# Altium PCB PCB1.PcbDoc
Units mm, origin at the board's own origin, x right, y up, seen from the top; angles counter-clockwise.
Board outline 92.5 x 77.5 mm, 2 copper layers (Top Layer, Bottom Layer); 40 components, 35 nets, 204 pads, 37 vias.
Unrouted connection lines stored in the file: 4.
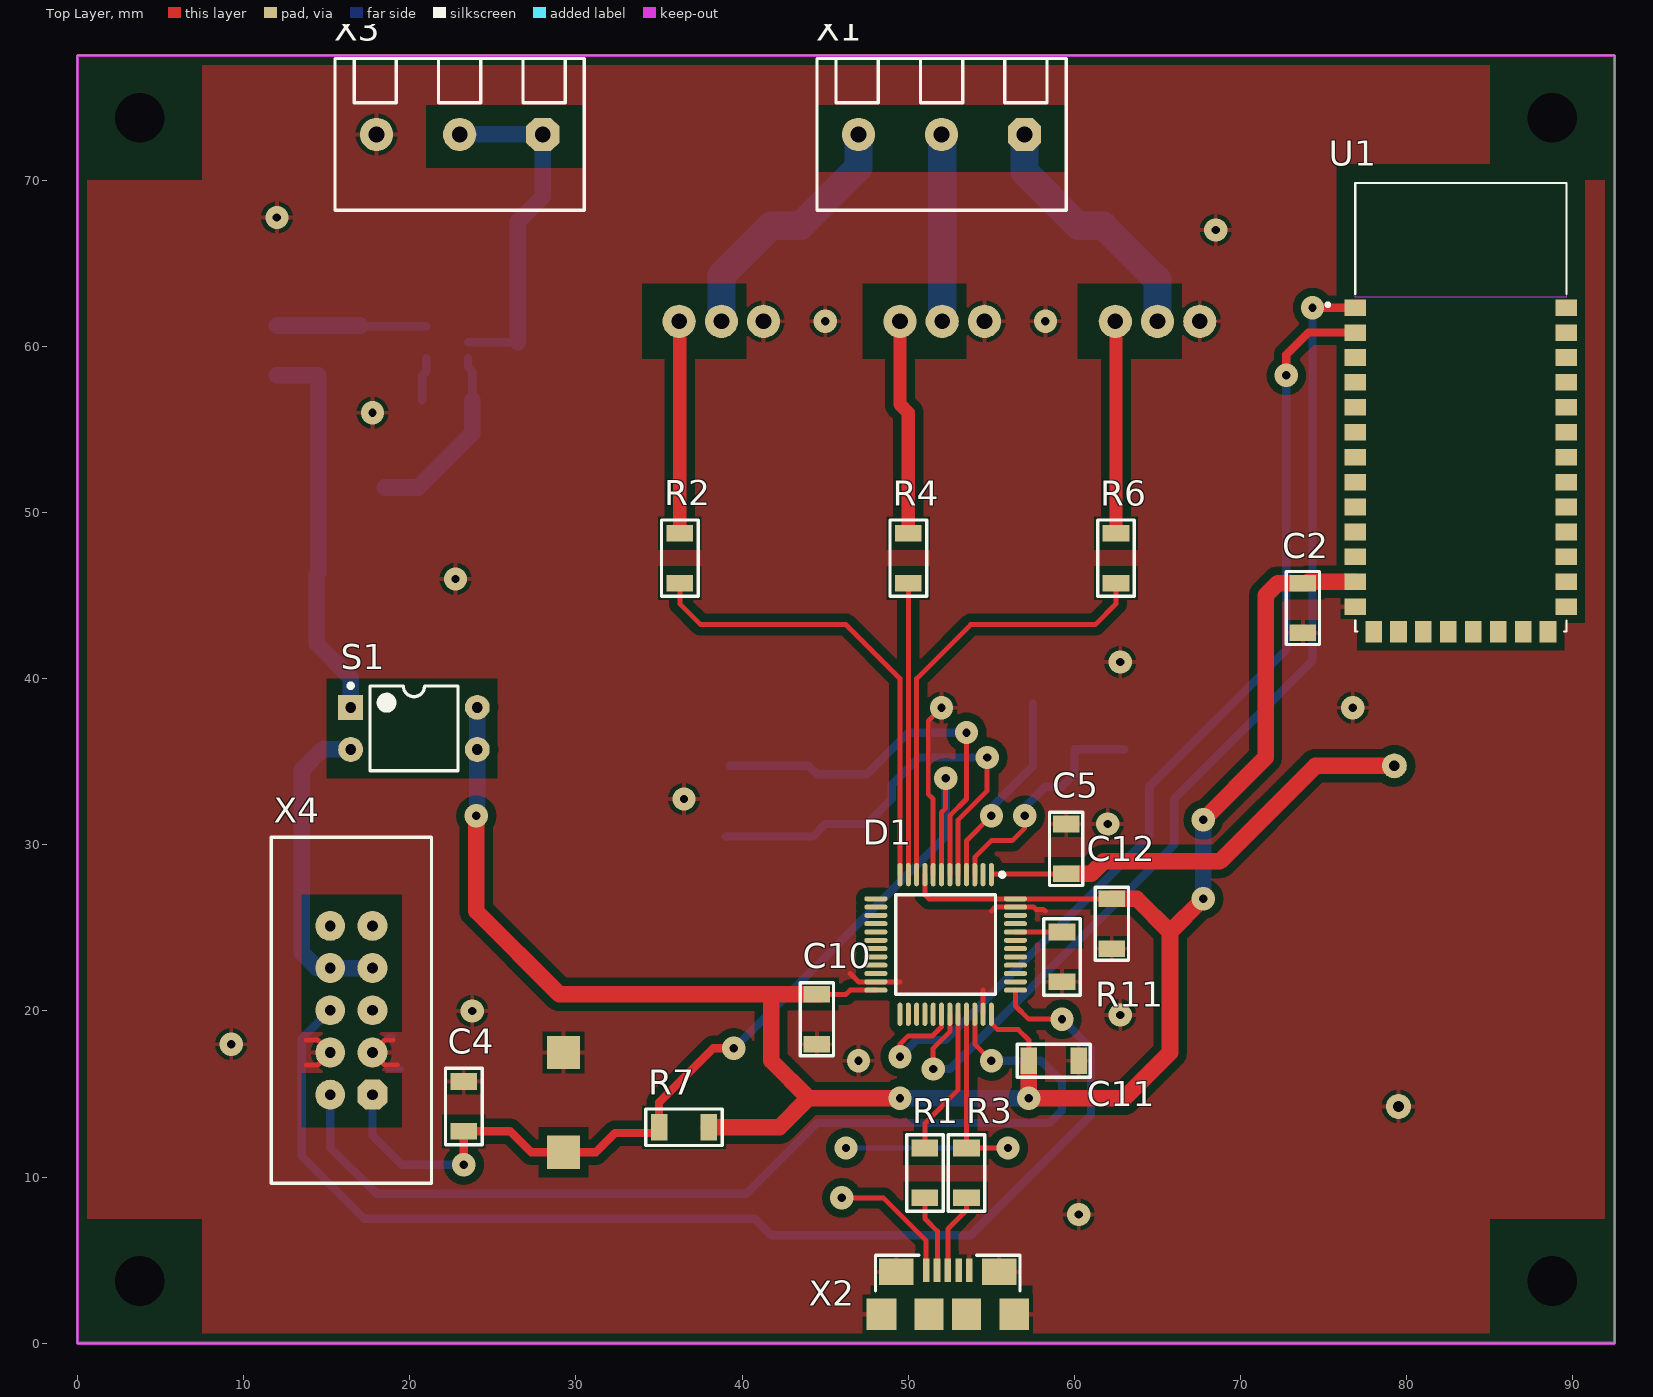
[diagram p0: Top Layer view]
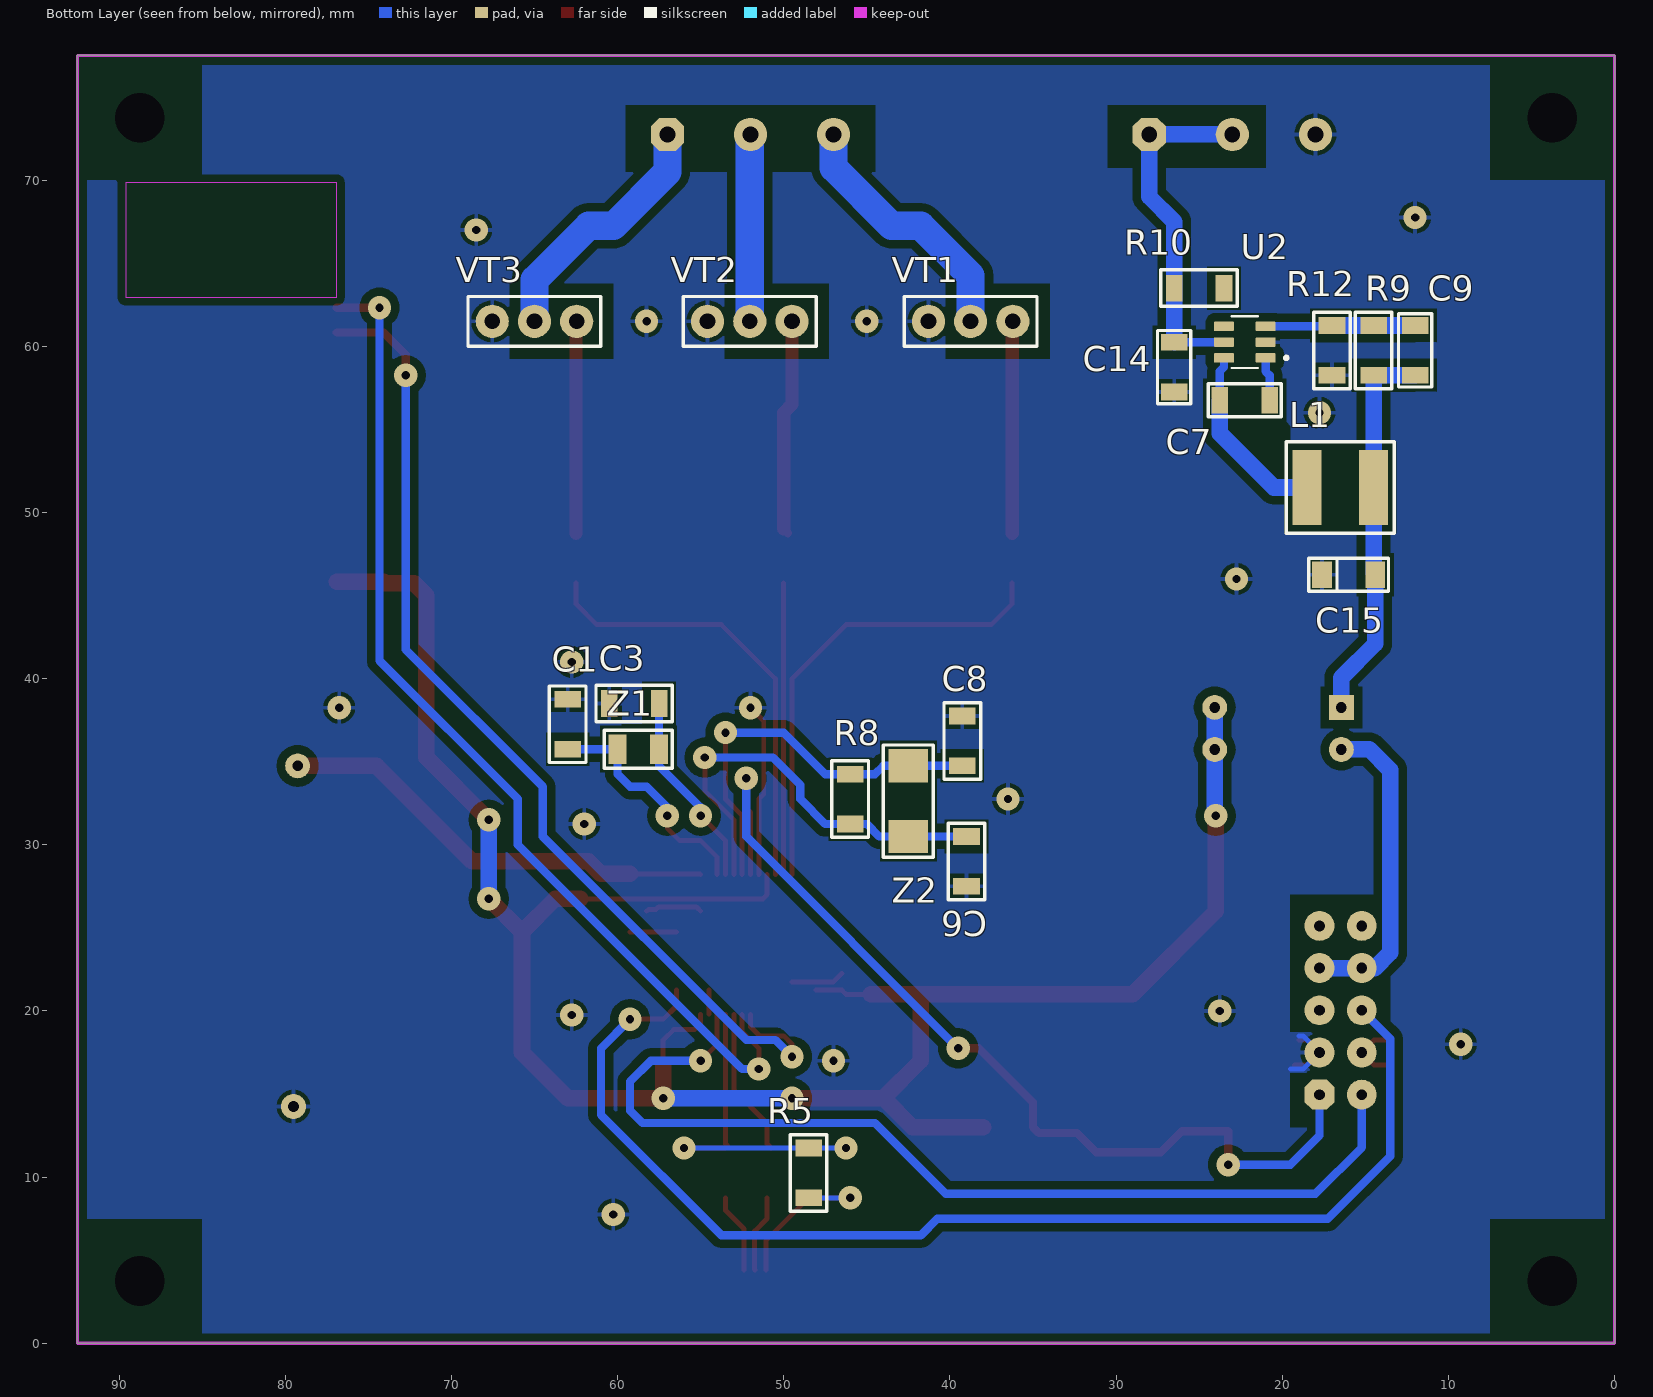
[diagram p1: Bottom Layer view, seen from below]
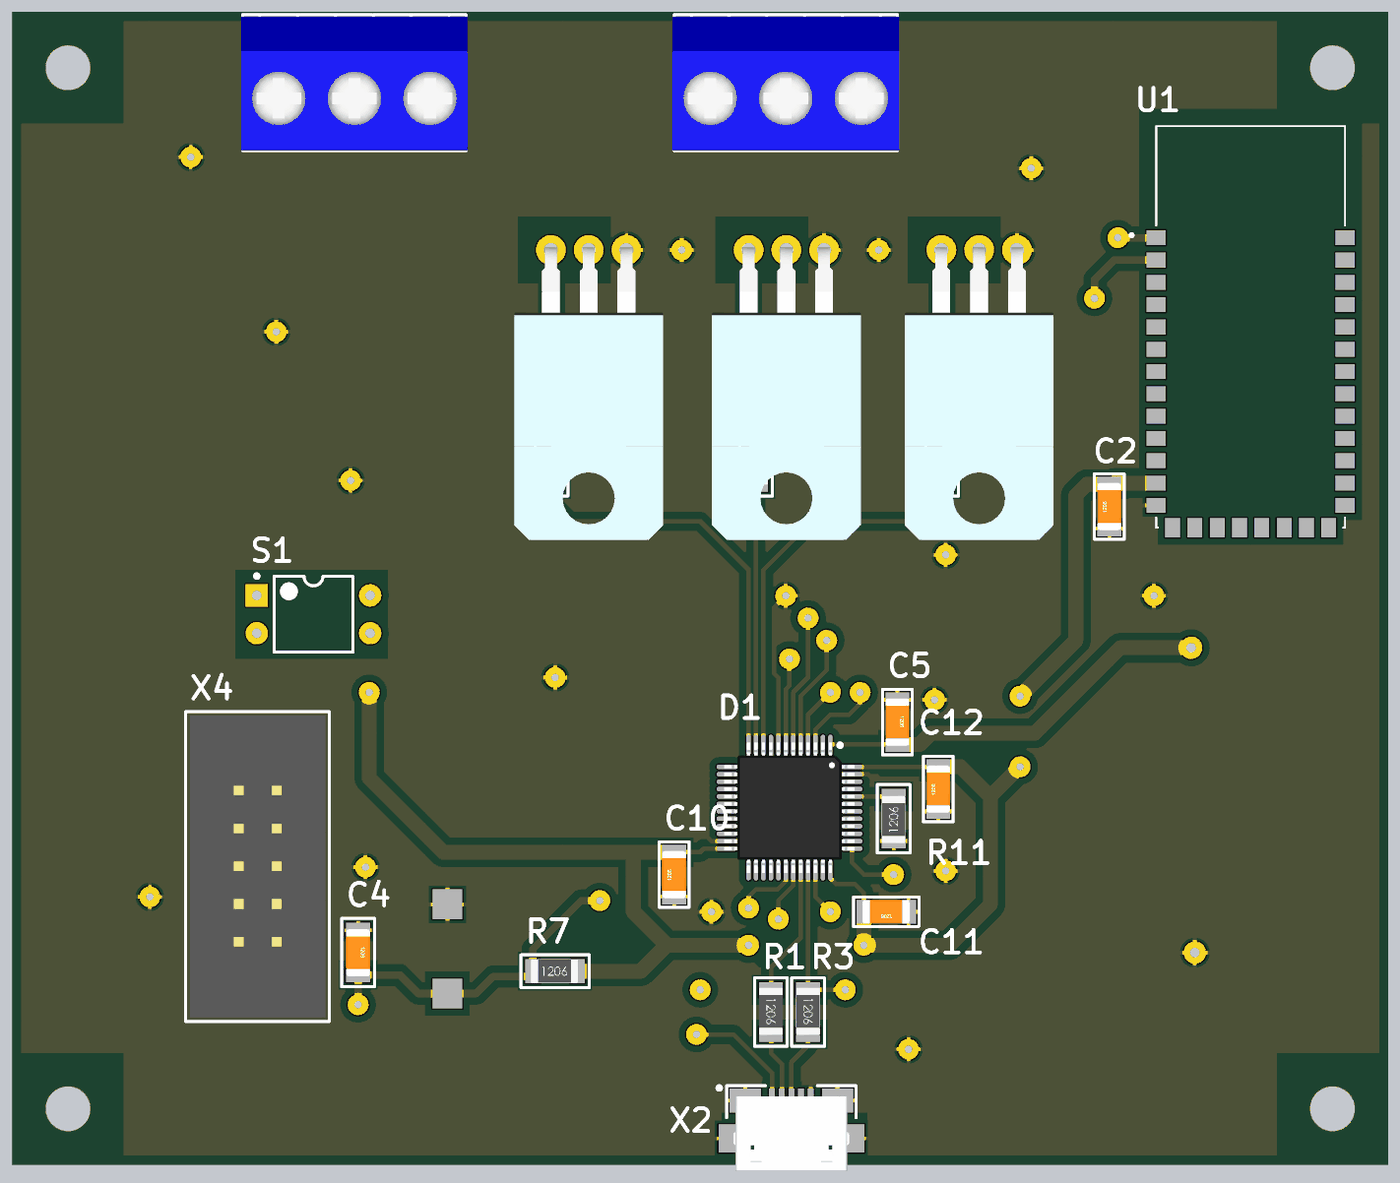
[diagram p2: 3D render of the assembled board from above, using the file's embedded part models]
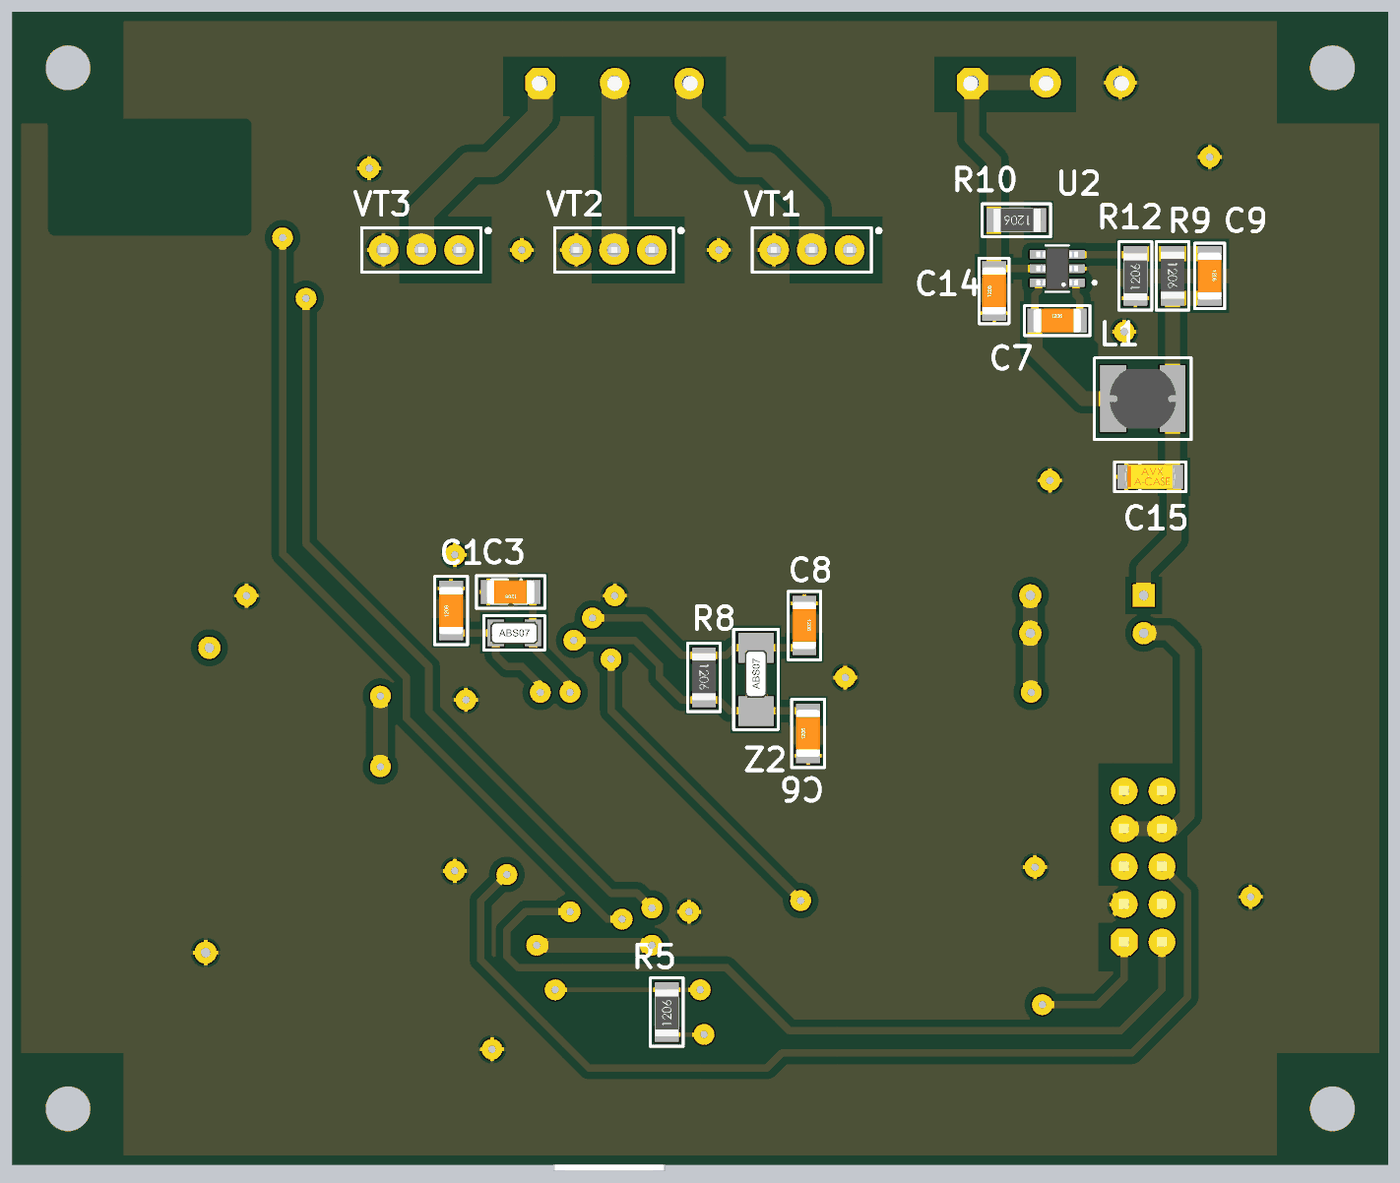
[diagram p3: 3D render of the assembled board from below, using the file's embedded part models]

## Layer stack, top to bottom
Top Solder: solder mask 0.0102, Solder Resist, Dk 3.5
Top Layer: signal copper 0.0356
Dielectric 1: dielectric 0.32, FR-4, Dk 4.8
Bottom Layer: signal copper 0.0356
Bottom Solder: solder mask 0.0102, Solder Resist, Dk 3.5

## Board outline
0,0 0,77.5 92.5,77.5 92.5,0

## Design rules (kind name [scope] priority, off if disabled: settings)
Clearance [All] p1: gap=0.2 ignorepadtopadclearanceinfootprint=TRUE except(0: Arc-Hole Track-Hole SMDPad-Hole THPad-Hole Via-Hole Fill-Hole Poly-Hole Region-Hole Text-Hole; 0.5: Arc-Fill Arc-Poly Arc-Region Track-Fill Track-Poly Track-Region SMDPad-Fill SMDPad-Poly SMDPad-Region THPad-Fill THPad-Poly THPad-Region Via-Fill Via-Poly Via-Region Fill-Fill Fill-Poly Fill-Region Poly-Poly Poly-Region Region-Region)
PolygonConnect [All] p1: connectstyle=Relief reliefconductorwidth=0.254 reliefentries=4 polygonreliefangle="90 Angle" airgapwidth=0.254
RoutingVias [All] p1: holewidth=0.711 width=1.27 viastyle="Through Hole" minholewidth=0.711 minwidth=1.27 maxholewidth=0.711 maxwidth=1.27
SolderMaskExpansion [All] p1: expansion=0.102
Width [All] p1: maxlimit=5 minlimit=0.254 preferedwidth=0.3
30 further rules are at their usual default settings.

## Components (designator, comment, footprint, x,y, rotation, side; value= is the part's Value field where it differs from the comment)
C1 "22pF" CH1206C 63,37.25 r90 bottom
C2 "Ceramic capacitor, 0.1uF, X7R, ±10%, 50V, 1206, -55...+125°C" "CAP: 1206" 73.75,44.25 r90 top value=0.1uF
C3 "22pF" CH1206C 59,38.5 r0 bottom
C4 "1uF" CH1206C 23.25,14.25 r270 top
C5 "Ceramic capacitor, 0.1uF, X7R, ±10%, 50V, 1206, -55...+125°C" "CAP: 1206" 59.5,29.75 r270 top value=0.1uF
C6 "22pF" CH1206C 39,29 r90 bottom
C7 "Ceramic capacitor, 0.1μF, X7R, ±10%, 50V, 1206, -55...+125°C" "CAP: 1206" 22.25,56.75 r180 bottom value=0.1?F
C8 "22pF" CH1206C 39.25,36.25 r270 bottom
C9 "Ceramic capacitor, 22pF, X7R, ±10%, 50V, 1206, -55...+125°C" "CAP: 1206" 12,59.75 r270 bottom value=22pF
C10 "Ceramic capacitor, 0.1uF, X7R, ±10%, 50V, 1206, -55...+125°C" "CAP: 1206" 44.5,19.5 r90 top value=0.1uF
C11 "Ceramic capacitor, 0.1uF, X7R, ±10%, 50V, 1206, -55...+125°C" "CAP: 1206" 58.75,17 r180 top value=0.1uF
C12 "Ceramic capacitor, 0.1uF, X7R, ±10%, 50V, 1206, -55...+125°C" "CAP: 1206" 62.25,25.25 r90 top value=0.1uF
C14 "Ceramic capacitor, 4.7μF, X7R, ±10%, 50V, 1206, -55...+125°C" "CAP: 1206" 26.5,58.75 r90 bottom value=4.7?F
C15 "Tantalum capacitor, 4.7μF, 6.3V, ±10%, 1.2Ohm, case B (3528), -55...+125°C" "CAP: TANTAL-A" 16,46.25 r180 bottom value=4.7?F
D1 "IC microcontroller, 32-Bit, Cortex-M3, 72MHz, 64KB, 20KB, 2...3.6V, -40...+85°C, 48-LQFP" 48-LQFP 52.25,24 r270 top
L1 "330uF" "IND: CD43" 16.5,51.5 r0 bottom
R1 "20" CH1206R 51,10.25 r270 top
R2 "1.5k" CH1206R 36.25,47.25 r270 top
R3 "20" CH1206R 53.5,10.25 r270 top
R4 "1.5k" CH1206R 50,47.25 r270 top
R5 "4.7k" CH1206R 48.5,10.25 r90 bottom
R6 "1.5k" CH1206R 62.5,47.25 r270 top
R7 "10k" CH1206R 36.5,13 r0 top
R8 "1M" CH1206R 46,32.75 r270 bottom
R9 "110k" CH1206R 14.5,59.75 r270 bottom
R10 "10k" CH1206R 25,63.5 r0 bottom
R11 "100k" CH1206R 59.25,23.25 r90 top
R12 "24k" CH1206R 17,59.75 r90 bottom
S1 "SW DIP-2" DIP-4 20.25,37 r0 top
U1 "HC-06" XCVR_HC-05 83.25,56 r0 top
U2 "SY8120B1ABC" SOT95P280X145-6N 22.25,60.25 r0 bottom
VT1 "КТ863А" TO220_123_H 38.75,61.5 r0 bottom
VT2 "КТ863А" TO220_123_H 52.04,61.5 r0 bottom
VT3 "КТ863А" TO220_123_H 65,61.5 r0 bottom
X1 "RGB Tape" "CON: 300-03P-5.0" 52,72.75 r180 top
X2 "\"USB micro\"" "CON: USB-A micro" 52.375,4.4 r0 top
X3 "Power" "CON: 300-03P-5.0" 23,72.75 r180 top
X4 "ST-LINK V2" "CON: IDC-10MS" 16.48,20.04 r90 top
Z1 "Crystal, 32.768kHz, 12.5pF, ±20ppm, case 3215, -40...+85°C" "OSC: 3215"#1 58.75,35.75 r180 bottom
Z2 "8MHz" "OSC: 3215"#2 42.5,33 r90 bottom

## Footprints (in the part's own frame and the unit in brackets; to place one, negate y for a bottom-side part, rotate by r counter-clockwise, add the part's x,y. Pads: shape width x height; smd on the part's side, far side on the other; paste and mask are expansions set on the pad)
48-LQFP [mm] "QFP, 48-Leads, Body 7x7mm, Pitch 0.5mm, IPC Medium Density"
  oval 1.4x0.3 smd: 1(-4.2,2.75) 2(-4.2,2.25) 3(-4.2,1.75) 4(-4.2,1.25) 5(-4.2,0.75) 6(-4.2,0.25) 7(-4.2,-0.25) 8(-4.2,-0.75) 9(-4.2,-1.25) 10(-4.2,-1.75) 11(-4.2,-2.25) 12(-4.2,-2.75) 25(4.2,-2.75) 26(4.2,-2.25) 27(4.2,-1.75) 28(4.2,-1.25) 29(4.2,-0.75) 30(4.2,-0.25) 31(4.2,0.25) 32(4.2,0.75) 33(4.2,1.25) 34(4.2,1.75) 35(4.2,2.25) 36(4.2,2.75)
  oval 0.3x1.4 smd: 13(-2.75,-4.2) 14(-2.25,-4.2) 15(-1.75,-4.2) 16(-1.25,-4.2) 17(-0.75,-4.2) 18(-0.25,-4.2) 19(0.25,-4.2) 20(0.75,-4.2) 21(1.25,-4.2) 22(1.75,-4.2) 23(2.25,-4.2) 24(2.75,-4.2) 37(2.75,4.2) 38(2.25,4.2) 39(1.75,4.2) 40(1.25,4.2) 41(0.75,4.2) 42(0.25,4.2) 43(-0.25,4.2) 44(-0.75,4.2) 45(-1.25,4.2) 46(-1.75,4.2) 47(-2.25,4.2) 48(-2.75,4.2)
  round 0.5 on Mech1: ""(-4,4)
  silkscreen extent -4.32,-3 3,3.53, body extent -4.39,-4.39 4.39,4.39, height 1.55
"CAP: 1206" [mm]
  rect 1x1.6 smd: 1(-1.5,0) 2(1.5,0)
  silkscreen extent -2.2,-1 2.2,1, body extent -1.6,-0.8 1.6,0.8, height 1
"CAP: TANTAL-A" [mm]
  rect 1.2x1.6 smd: 1(-1.6,0) 2(1.6,0)
  silkscreen extent -2.4,-1 2.4,1, body extent -1.7,-0.84 1.7,0.84, height 1.71
CH1206C [mm] "Non polar chip capacitor, size 1206"
  rect 1x1.6 smd: 1(-1.5,0) 2(1.5,0)
  silkscreen extent -2.3,-1.1 2.3,1.1, body extent -1.6,-0.8 1.6,0.8, height 1
CH1206R [mm] "Chip Resistor, 2-Leads, Body 3,0x1,5mm, IPC Low Density"
  rect 1x1.6 smd: 1(-1.5,0) 2(1.5,0)
  silkscreen extent -2.3,-1.1 2.3,1.1, body extent -1.65,-0.8 1.55,0.8, height 0.47
"CON: 300-03P-5.0" [mm] "3 pin 5.08mm screw connector"
  oct 2x2 hole 0.95: 1(-5,0)
  round 2 hole 0.95: 2(0,0) 3(5,0)
  round 0.5 on Mech1: 11(-6.7,-3.7)
  silkscreen extent -7.5,-4.57 7.5,4.57, body extent -7.62,-4.44 7.62,4.56, height 12.5
"CON: IDC-10MS" [mm] "IDC-10MS 10 pin PCB-mount header"
  oct 1.8x1.8 hole 0.65: 1(-5.08,-1.27)
  round 1.8 hole 0.65: 2(-5.08,1.27) 3(-2.54,-1.27) 4(-2.54,1.27) 5(0,-1.27) 6(0,1.27) 7(2.54,-1.27) 8(2.54,1.27) 9(5.08,-1.27) 10(5.08,1.27)
  silkscreen extent -10.41,-4.83 10.41,4.83, body extent -10.14,-4.57 10.16,4.53, height 9
"CON: USB-A micro" [mm]
  rect 1.8x1.9 smd: 0(-4,-2.65) 0(4,-2.65)
  rect 2.1x1.6 smd: 0(-3.1,-0.1) 0(3.1,-0.1)
  rect 1.75x1.9 smd: 0(-1.125,-2.65) 0(1.125,-2.65)
  rect 0.4x1.4 smd: 1(-1.3,0) 2(-0.65,0) 3(0,0) 4(0.65,0) 5(1.3,0)
  round 0.5 on Top Overlay: ""(-4.85,0.75)
  silkscreen extent -4.35,-1.25 4.35,0.9, body extent -3.9,-4.8 3.9,0.2, height 2.68
DIP-4 [mm] "DIP; 4 Leads; Row Spacing 7.62 mm; Pitch 2.54 mm"
  rect 1.5x1.5 hole 0.65: 1(-3.81,1.27)
  round 1.5 hole 0.65: 2(-3.81,-1.27) 3(3.81,-1.27) 4(3.81,1.27)
  silkscreen extent -3.93,-2.55 2.65,2.69, body extent -3.15,-2.5 3.15,2.5, height 5.6
"IND: CD43" [mm]
  rect 1.75x4.5 smd: 1(-2,0) 2(2,0)
  silkscreen extent -3.25,-2.75 3.25,2.75, body extent -2.24,-2 2.24,2, height 3.2
"OSC: 3215"#1 [mm]
  rect 1.1x1.8 smd: 1(-1.25,0) 2(1.25,0)
  silkscreen extent -2.05,-1.15 2.05,1.15, body extent -1.61,-0.76 1.61,0.76, height 0.91
"OSC: 3215"#2 [mm]
  rect 2x2.4 smd: 1(-2.5,0) 3(1.75,0)
  silkscreen extent -3.75,-1.5 3,1.5, body extent -1.61,-0.76 1.61,0.76, height 0.91
SOT95P280X145-6N [mm]
  rrect25% 1.21x0.58 smd: 1(-1.255,0.95) 2(-1.255,0) 3(-1.255,-0.95) 4(1.255,-0.95) 5(1.255,0) 6(1.255,0.95)
  silkscreen extent -2.6,-1.56 0.8,1.56, body extent -1.4,-1.45 1.4,1.45, height 1.45
TO220_123_H [mm] "Generic TO-220 case, stay variant"
  round 2 hole 0.95: 1(-2.54,0) 2(0,0) 3(2.54,0)
  round 0.5 on Bottom Overlay: ""(-4.5,-1.3)
  round 0.5 on Mech1: ""(-3.5,-1)
  silkscreen extent -4,-1.5 4,1.5, body extent -5,-0.2 5,19.5, height 1.2
XCVR_HC-05 [mm]
  rect 1.3x1 smd: 1(-6.35,6.325) 2(-6.35,4.825) 3(-6.35,3.325) 4(-6.35,1.825) 5(-6.35,0.325) 6(-6.35,-1.175) 7(-6.35,-2.675) 8(-6.35,-4.175) 9(-6.35,-5.675) 10(-6.35,-7.175) 11(-6.35,-8.675) 12(-6.35,-10.175) 13(-6.35,-11.675) 22(6.35,-11.675) 23(6.35,-10.175) 24(6.35,-8.675) 25(6.35,-7.175) 26(6.35,-5.675) 27(6.35,-4.175) 28(6.35,-2.675) 29(6.35,-1.175) 30(6.35,0.325) 31(6.35,1.825) 32(6.35,3.325) 33(6.35,4.825) 34(6.35,6.325)
  rect 1x1.3 smd: 14(-5.25,-13.175) 15(-3.75,-13.175) 16(-2.25,-13.175) 17(-0.75,-13.175) 18(0.75,-13.175) 19(2.25,-13.175) 20(3.75,-13.175) 21(5.25,-13.175)
  Keep-Out Layer region: 6.35,6.95 -6.35,6.95 -6.35,13.85 6.35,13.85
  Keep-Out Layer region: 6.35,6.95 -6.35,6.95 -6.35,13.85 6.35,13.85
  Keep-Out Layer region: 6.35,6.95 -6.35,6.95 -6.35,13.85 6.35,13.85
  silkscreen extent -8.1,-13.18 6.35,13.82

## Part data
C1 C3 C4 C6 C8: library part Capacitor
C2 C5 C9 C10 C11 C12: library part Ceramic_1206, Manufacturer=Yageo, Package=1206, PartNumber=CC1206KRX7R9BB104, Temperature=-55...+125°C, Tolerance=±10%, TypeCapacitor="Ceramic capacitor", TypeDielectric=X7R, Voltage=50V, HelpURL=https://www.digikey.com/product-detail/en/yageo/CC1206KRX7R9BB104/311-1179-1-ND/303089
  C2 C5 C10 C11 C12: ValueManufacturerPartNumber="Ceramic capacitor, 0.1uF, X7R, ±10%, 50V, 1206, -55...+125°C"
  C9: ValueManufacturerPartNumber="Ceramic capacitor, 22pF, X7R, ±10%, 50V, 1206, -55...+125°C"
C7: library part Ceramic_1206, Manufacturer=Yageo, Package=1206, PartNumber=CC1206KRX7R9BB104, Temperature=-55...+125°C, Tolerance=±10%, TypeCapacitor="Ceramic capacitor", TypeDielectric=X7R, ValueManufacturerPartNumber="Ceramic capacitor, 0.1?F, X7R, ±10%, 50V, 1206, -55...+125°C", Voltage=50V, HelpURL=https://www.digikey.com/product-detail/en/yageo/CC1206KRX7R9BB104/311-1179-1-ND/303089
C14: library part Ceramic_1206, Manufacturer=Yageo, Package=1206, PartNumber=CC1206KRX7R9BB104, Temperature=-55...+125°C, Tolerance=±10%, TypeCapacitor="Ceramic capacitor", TypeDielectric=X7R, ValueManufacturerPartNumber="Ceramic capacitor, 4.7?F, X7R, ±10%, 50V, 1206, -55...+125°C", Voltage=50V, HelpURL=https://www.digikey.com/product-detail/en/yageo/CC1206KRX7R9BB104/311-1179-1-ND/303089
C15: library part Tantal_B, Manufacturer=AVX, Package="case B (3528)", PartNumber=F930J227KBA, Temperature=-55...+125°C, Tolerance=±10%, TypeCapacitor="Tantalum capacitor", TypeDielectric=X7R, ValueManufacturerPartNumber="Tantalum capacitor, 4.7?F, 6.3V, ±10%, 1.2Ohm, case B (3528), -55...+125°C", Voltage=6.3V, HelpURL=https://www.digikey.com/product-detail/en/avx-corporation/F930J227KBA/478-8166-1-ND/4005570, Impedance=1.2Ohm
D1: library part STM32F103C8T6, "Cortex-M3", Manufacturer=STMicroelectronics, Package=48-LQFP, Temperature=-40...+85°C, ComponentType="IC microcontroller", CoreProcessor=Cortex-M3, CoreSize=32-Bit, HelpURL=https://www.digikey.com/product-detail/en/stmicroelectronics/STM32F103C8T6TR/497-17666-1-ND/7804402, MemoryRAM=20KB, MemoryROM=64KB, PartNumber=STM32F103C8T6, Speed=72MHz, Supply=2...3.6V, ValueManufacturerPartNumber="IC microcontroller, 32-Bit, Cortex-M3, 72MHz, 64KB, 20KB, 2...3.6V, -40...+85°C, 48-LQFP"
L1: library part Inductor
R1 R2 R3 R4 R5 R6 R7 R8 R9 R10 R11 R12: library part Resistor
S1: "DIP Switch, 2 Position, SPST", LatestRevisionDate=17-Jul-2002, LatestRevisionNote="Re-released for DXP Platform.", PackageReference=DIP-4, Published=24-Mar-1999, Publisher="Altium Limited"
U1: library part HC-05, "Bluetooth to Serial Port Module", Package=SOIC-14, Availability=Unavailable, Check_prices=https://www.snapeda.com/parts/HC-05/Bel%20Power%20Solutions/view-part/106410/?ref=eda, MF="Bel Power solution", MP=HC-05, Price=None, SnapEDA_Link=https://www.snapeda.com/parts/HC-05/Bel%20Power%20Solutions/view-part/106410/?ref=snap
U2: library part TPS2553DBVT, "75mA - 1.5A, adjustable ILIMIT, 2.5-6.5V, high enable, power switch, 85 mOhm 6-SOT-23 -40 to 85", Package="SOT-23-6 Texas Instruments", Availability=Warning, Check_prices=https://www.snapeda.com/parts/TPS2553DBVT/Texas%20Instruments/view-part/425867/?ref=eda, MF="Texas Instruments", MP=TPS2553DBVT, Price=None, Purchase-URL=https://pricing.snapeda.com/search/part/TPS2553DBVT/?ref=eda, SnapEDA_Link=https://www.snapeda.com/parts/TPS2553DBVT/Texas%20Instruments/view-part/425867/?ref=snap
VT1 VT2 VT3: library part NPN, "Bipolar"
X1 X3: library part 3-Connector
X2: library part USB-AM, "USB", Manufacturer=Hirose, ComponentKind="type micro A", HelpURL=https://lcsc.com/product-detail/USB-Connectors_HRS_ZX62-B-5PA-33_ZX62-B-5PA-33_C132561.html, Model=ZX62-B-5PA
X4: library part 10-Connector
Z1: library part Crystal_3215, Frequency=32.768kHz, LoadCapacitance=12.5pF, Manufacturer=Epson, Package="case 3215", PartNumber="FC-135 32.7680KA-A5", Temperature=-40...+85°C, Tolerance=±20ppm, HelpURL=https://www.digikey.com/product-detail/en/epson/FC-135-32.7680KA-A5/SER4103CT-ND/6188447, TypeOscilator=Crystal, ValueManufacturerPartNumber="Crystal, 32.768kHz, 12.5pF, ±20ppm, case 3215, -40...+85°C"
Z2: library part Oscillator

## Free pads (board coordinates)
  round 1.5 hole 0.65: 3(79.25,34.75) 4(79.5,14.25)
  round 1.5 hole 3: 5(3.75,3.75) 5(3.75,73.75) 5(88.75,3.75) 5(88.75,73.75)
  rect 2x2 smd: 6(29.25,11.5) 7(29.25,17.5)

## Via types
v1: diameter 1.4, hole 0.5, Top Layer to Bottom Layer, 37 vias

## Nets (pads, with @x,y where several pads share a name; then routed paths per layer and width w, separated by ;. In a path a pad name is that pad's centre, name@x,y a point inside that pad or via, vN(x,y) a via of type N, cw(c..) or ccw(c..) an arc to the next point about the centre after c; other vN are vias at no path point)
+3.3V: C9.2 C15.2 L1.1 R9.2 S1.1 | length 23.4
  Bottom Layer w0.5: C15.2 C15.2@14.5,46.35
  Bottom Layer w1: C9.2 R9.2 L1.1 C15.2@14.5,46.35 ; C15.2 14.4,42.1 16.44,40.06 S1.1
+3.3V_PROG: S1.2 X4.7 X4.8 | length 19.1
  Bottom Layer w1: S1.2 16.42,35.75 14.75,35.75 13.5,34.5 13.5,23.5 14.42,22.58 X4.8 X4.7
+5V: R5.1 X2.1 | length 10.4
  Top Layer w0.3: v1(46,8.75) 48.5,8.75 51.075,6.175 X2.1
  Bottom Layer w0.3: v1(46,8.75) R5.1
+12V: C14.2 R10.2 U2.5 X3.1 X3.2 | length 21.4
  Bottom Layer w0.5: U2.5 C14.2 C14.2@26.5,60
  Bottom Layer w1: X3.2 X3.1 28,69 26.5,67.5 R10.2 C14.2
BOOT: D1.44 R11.2 | length 2.8
  Top Layer w0.3: D1.44 R11.2
BT_RX: D1.31 U1.1 | length 62.2
  Top Layer w0.3: v1(51.5,16.5) 51.5,17.75 52.5,18.75 D1.31
  Top Layer w0.5: v1(74.325,62.325) U1.1
  Bottom Layer w0.5: v1(51.5,16.5) 52.5,16.5 66,30 66,32.75 74.325,41.075 v1(74.325,62.325)
BT_TX: D1.30 U1.2 | length 62
  Top Layer w0.3: v1(49.5,17.25) 49.5,18 50,18.5 51.457,18.5 52,19.043 D1.30
  Top Layer w0.5: v1(72.75,58.25) 72.75,59.5 74.075,60.825 U1.2
  Bottom Layer w0.5: v1(49.5,17.25) 50.5,18.25 52.25,18.25 64.5,30.5 64.5,33.5 72.75,41.75 v1(72.75,58.25)
GND: C1.2 C2.1 C3.2 C4.1 C5.1 C6.1 C8.1 C10.1 C11.1 C12.1 C14.1 C15.1 D1.8 D1.23 D1.35 D1.47 pad.4 pad.7 R11.1 R12.1 U1.13 U2.2 VT1.3 VT2.3 VT3.3 X2.0 X2.4 X2.5 X3.3 X4.3 X4.4 | length 29.4
  Top Layer w0.3: 13.75,16.75 14.46,16.75 X4.4 14.46,18.25 13.75,18.25 ; 19,18.25 18.5,18.25 X4.3 18.5,16.75 19.25,16.75 ; 46.5,22.25 47,21.75 D1.23 49.5,21.75 ; D1.8 51.5,32.75 51.2,33.05 51.2,37.45 v1(52,38.25) ; D1.35 54.5,21.25 ; 55,26 55.25,26.25 D1.47 57.544,26.25 57.694,26.099 58.151,26.099 58.25,26
  Bottom Layer w0.3: 19,18.5 18.75,18.5 X4.3 18.75,16.5 19.5,16.5
  other v1: 60.25,7.75 47,17 9.25,18 62.75,19.75 23.75,20 62,31.25 36.5,32.75 76.75,38.25 62.75,41 22.75,46 17.75,56 45,61.5 58.25,61.5 68.5,67 12,67.75
NetBT1_2: 
NetC6_2: C6.2 D1.5 R8.2 Z2.1 | length 26
  Top Layer w0.3: D1.5 53,31.5 54.75,33.25 v1(54.75,35.25)
  Bottom Layer w0.5: C6.2 Z2.1 ; Z2.1 44.25,30.5 45,31.25 R8.2 47.5,31.25 49,32.75 49,33.6 50.65,35.25 v1(54.75,35.25)
NetC7_1: C7.1 L1.2 U2.6 | length 11.2
  Bottom Layer w0.5: U2.6 23.505,58.745 23.75,58.5 C7.1
  Bottom Layer w1: L1.2 20.5,51.5 23.75,54.75 C7.1
NetC7_2: C7.2 U2.1 | length 2.7
  Bottom Layer w0.5: C7.2 20.75,58.25 20.995,58.495 U2.1
NetC8_2: C8.2 D1.6 R8.1 Z2.3 | length 24.5
  Top Layer w0.3: D1.6 52.5,31.75 53.5,32.75 v1(53.5,36.75)
  Bottom Layer w0.5: C8.2 Z2.3 44,34.75 44.5,34.25 R8.1 47.5,34.25 50,36.75 v1(53.5,36.75)
NetC9_1: C9.1 R9.1 R12.2 U2.3 | length 9
  Bottom Layer w0.5: R12.2 17.05,61.2 U2.3
  Bottom Layer w1: C9.1 R9.1 R12.2
NetR1_2: R1.2 X2.2 | length 4.7
  Top Layer w0.3: R1.2 51,7.5 51.75,6.75 51.75,4.425 X2.2
NetR2_1: R2.1 VT1.1 | length 12.7
  Top Layer w0.8: R2.1 VT1.1@36.25,61.5
NetR3_2: R3.2 X2.3 | length 4.8
  Top Layer w0.3: X2.3 52.375,6.875 53.5,8 R3.2
NetR4_1: R4.1 VT2.1 | length 13.1
  Top Layer w0.5: R4.1@49.75,48.75 R4.1@50,49
  Top Layer w0.8: VT2.1 49.5,56.5 50,56 R4.1@50,49
NetR6_1: R6.1 VT3.1 | length 12.7
  Top Layer w0.8: R6.1 VT3.1@62.5,61.5
NetR10_1: R10.1 U2.4
NetVT1_2: VT1.2 X1.3 | length 15.7
  Bottom Layer w1.7: VT1.2 38.75,64.25 41.75,67.25 43.5,67.25 47,70.75 X1.3
NetVT2_2: VT2.2 X1.2 | length 11.3
  Bottom Layer w1.7: X1.2 52.04,72.71 VT2.2
NetVT3_2: VT3.2 X1.1 | length 15.4
  Bottom Layer w1.7: X1.1 57,70.5 60.25,67.25 61.75,67.25 65,64 VT3.2
OSC32_IN: C1.1 D1.3 Z1.1 | length 14.4
  Top Layer w0.3: D1.3 54,29.25 55,30.25 56.25,30.25 57,31 v1(57,31.75)
  Bottom Layer w0.5: v1(57,31.75) 57,32.25 58.25,33.5 59.25,33.5 60,34.25 Z1.1 C1.1
OSC32_OUT: C3.1 D1.4 Z1.2 | length 12
  Top Layer w0.3: D1.4 53.5,30.25 v1(55,31.75)
  Bottom Layer w0.5: v1(55,31.75) 55,32.25 57.5,34.75 Z1.2 ; Z1.2 C3.1
PWM_BLUE: D1.12 R2.2 | length 28.2
  Top Layer w0.3: R2.2 36.25,44.5 37.5,43.25 46.25,43.25 49.5,40 D1.12
PWM_GREEN: D1.11 R4.2 | length 17.6
  Top Layer w0.3: D1.11 R4.2
PWM_RED: D1.10 R6.2 | length 26.9
  Top Layer w0.3: D1.10 50.5,40 53.75,43.25 61.25,43.25 62.5,44.5 R6.2
RST: C4.2 D1.7 pad.6 R7.1 X4.1 | length 58.4
  Top Layer w0.3: D1.7 52,31.957 52.25,32.207 v1(52.25,34)
  Top Layer w0.5: v1(23.25,10.75) C4.2 26.05,12.75 27.3,11.5 pad.6 31.2,11.5 32.35,12.65 34.65,12.65 R7.1 35,14.5 38.25,17.75 v1(39.5,17.75)
  Bottom Layer w0.5: X4.1 17.75,12.5 19.5,10.75 v1(23.25,10.75) ; v1(39.5,17.75) 52.25,30.5 v1(52.25,34)
SWCLK: D1.37 X4.6 | length 72.5
  Top Layer w0.3: D1.37 56.45,20.3 57.25,19.5 v1(59.25,19.5)
  Bottom Layer w0.5: X4.6 13.5,18.33 13.5,11.25 17.25,7.5 40.75,7.5 41.75,6.5 53.75,6.5 61,13.75 61,17.75 v1(59.25,19.5)
SWDIO: D1.34 X4.2 | length 60.2
  Top Layer w0.3: D1.34 54,18 v1(55,17)
  Bottom Layer w0.5: X4.2 15.21,11.79 18,9 40.25,9 44.5,13.25 58.5,13.25 59.25,14 59.25,15.75 58,17 v1(55,17)
USB_DM: D1.32 R1.1 | length 9
  Top Layer w0.3: R1.1@50.75,11.75 51,12 51,13.25 53,15.25 D1.32
USB_DP: D1.33 R3.1 R5.2 | length 20.2
  Top Layer w0.3: R3.1@53.375,11.875 53.5,12 D1.33 ; R3.1 v1(56,11.75)
  Bottom Layer w0.3: v1(46.25,11.75) R5.2 v1(56,11.75)
VBAT: C5.2 D1.1 pad.3 | length 27
  Top Layer w0.3: D1.1 55.05,28.25 C5.2@59.25,28.25
  Top Layer w1: C5.2@59.25,28.25 C5.2 61,28.25 61.75,29 68.75,29 74.5,34.75 pad.3
VDD: C2.2 C10.2 C11.2 C12.2 D1.9 D1.24 D1.36 D1.48 R7.2 S1.3 S1.4 U1.12 | length 134.2
  Top Layer w0.3: C10.2@44.75,21 46.25,21 46.5,21.25 D1.24 ; D1.9 51,27 51.25,26.75 D1.48 C12.2 ; D1.36 55,19.25 55.375,18.875 56.625,18.875 57.25,18.25 C11.2@57.25,17.125
  Top Layer w1: v1(24,31.75) 24,26 29,21 41.75,21 ; R7.2 42.25,13 44,14.75 ; C10.2@44.75,21 C10.2 41.75,21 ; v1(49.5,14.75) 44,14.75 ; C11.2@57.25,16.75 v1(57.25,14.75) 63,14.75 65.75,17.5 65.75,24.75 ; C12.2 63.75,26.75 65.75,24.75 ; v1(67.75,26.75) 65.75,24.75 ; v1(67.75,31.5) 71.5,35.25 71.5,45 72.25,45.75 C2.2 74,45.75 74.075,45.825 U1.12 ; 41.75,21 41.75,17 44,14.75
  Bottom Layer w1: v1(24,31.75) 24.06,31.81 S1.3 S1.4 ; v1(49.5,14.75) v1(57.25,14.75) ; v1(67.75,26.75) v1(67.75,31.5)
pads on no net: D1. D1.2 D1.13 D1.14 D1.15 D1.16 D1.17 D1.18 D1.19 D1.20 D1.21 D1.22 D1.25 D1.26 D1.27 D1.28 D1.29 D1.38 D1.39 D1.40 D1.41 D1.42 D1.43 D1.45 D1.46 U1.3 U1.4 U1.5 U1.6 U1.7 U1.8 U1.9 U1.10 U1.11 U1.14 U1.15 U1.16 U1.17 U1.18 U1.19 U1.20 U1.21 U1.22 U1.23 U1.24 U1.25 U1.26 U1.27 U1.28 U1.29 U1.30 U1.31 U1.32 U1.33 U1.34 VT1. VT2. VT3. X1.11 X2. X3.11 X4.5 X4.9 X4.10

## Polygon pours and split planes (outlines as drawn)
GND on Top Layer "TL" (solid, remove dead copper, pour order 0): 0,77.5 0,0 92.5,0 92.5,77.5
GND on Bottom Layer "BL" (solid, remove dead copper, pour order 2): 0,77.5 92.5,77.5 92.5,0 0,0

## Keep-outs
Keep-Out Layer:
  the board outline again, w0.2

## Other copper
Top Layer:
  pour cut-out: 40.25,63.75 40.25,59.25 34,59.25 34,63.75
  pour cut-out: 66.46,63.75 66.46,59.25 60.21,59.25 60.21,63.75
  pour cut-out: 53.5,63.75 53.5,59.25 47.25,59.25 47.25,63.75
  pour cut-out: 44.5,74.5 59.5,74.5 59.5,70.5 44.5,70.5
  pour cut-out: 30.5,74.5 21,74.5 21,70.75 30.5,70.75
  pour cut-out: 14.781,16.293 14.738,16.25 13.5,16.25 13.5,13 19.5,13 19.5,16.25
  pour cut-out: 0,77.5 7.75,77.5 7.5,77.25 7.5,70 0,70
  pour cut-out: 50.75,13.25 50.229,13.25 49.871,13.608 50.25,13.987 50.25,15.5 49.75,15.5 49.5,15.75 49.5,16.5 50.5,16.5 51.25,15.75 52.5,15.75 52.5,15.25
  pour cut-out: 25.25,40 25.25,34 15,34 15,40
  pour cut-out: 41,17.75 41.75,17 41.75,15.584 42.584,14.75 42.25,14.416 42.25,14 40,14 39.75,13.75 37.25,13.75 37.25,11.95 37,11.7 36,11.7 36,14.75 38.5,17.25
  pour cut-out: 57.5,3.5 57.5,2.983 57.529,2.954 57.325,2.75 55.5,2.75 55.5,0.5 49.25,0.5 49.25,2.75 49.046,2.954 47.704,2.954 47.704,3.5
  pour cut-out: 67.5,28.25 67.25,28 67.25,27.25 65.75,25.75 64,27.5 61.75,27.5 62,27.75 62,28.25
  pour cut-out: 19.5,18.75 13.5,18.75 13.5,27 19.5,27
  pour cut-out: 0,0 7.75,0 7.5,0.25 7.5,7.5 0,7.5
  pour cut-out: 92.5,0 84.75,0 85,0.25 85,7.5 92.5,7.5
  pour cut-out: 92.5,77.5 84.75,77.5 85,77.25 85,70 92.5,70
  pour cut-out: 90.75,63.325 90.75,71 75.75,71 75.75,63.325
  pour cut-out: 77.75,62.75 77.75,43.75 88.75,43.75 88.75,62.75
Bottom Layer:
  pour cut-out: 19.75,55.45 19.5,55.2 19.5,52.25 20.25,52.25 23,55 23,55.75
  pour cut-out: 15.501,48.75 17.5,48.75 17.75,49 17.75,54.25 15.501,54.25
  pour cut-out: 22.972,61.991 21.595,61.991 21.5,61.896 21.5,55.5 21.55,55.45 22.749,55.45
  pour cut-out: 59.25,34 58.25,34 58.25,37.25 59.75,37.25 59.75,34.5
  pour cut-out: 48.5,32.75 48.25,32.75 47.25,31.75 47,32 45,32 44.25,31.25 43.75,31.75 41.299,31.75 40.8,31.251 40.8,33.999 48.499,33.999 48.5,34
  pour cut-out: 66.5,63.75 66.5,59.25 60.25,59.25 60.25,63.75
  pour cut-out: 53.54,63.75 53.54,59.25 47.29,59.25 47.29,63.75
  pour cut-out: 40.25,63.75 40.25,59.25 34,59.25 34,63.75
  pour cut-out: 44.5,74.5 59.5,74.5 59.5,70.5 44.5,70.5
  pour cut-out: 30.5,74.5 21,74.5 21,70.75 30.5,70.75
  pour cut-out: 14.781,16.293 14.738,16.25 13.5,16.25 13.5,13 19.5,13 19.5,16.25
  pour cut-out: 19.5,18.75 13.5,18.75 13.5,27 19.5,27
  pour cut-out: 0,0 7.75,0 7.5,0.25 7.5,7.5 0,7.5
  pour cut-out: 92.5,0 84.75,0 85,0.25 85,7.5 92.5,7.5
  pour cut-out: 92.5,77.5 84.75,77.5 85,77.25 85,70 92.5,70
  pour cut-out: 0,77.5 7.75,77.5 7.5,77.25 7.5,70 0,70

## Silkscreen, mask and mechanical layers (free items; w line width, h text height)
Size:
  lines w0.254: -0.254,-6.34 -0.254,-5.832 ; 1.27,-6.594 -0.254,-6.086 ; 1.27,-5.578 -0.254,-6.086 ; 39.496,-6.086 -0.254,-6.086 ; 52.497,-6.086 92.246,-6.086 ; 90.722,-6.594 92.246,-6.086 ; 90.722,-5.578 92.246,-6.086 ; 92.246,-6.34 92.246,-5.832 ; 98.578,1.27 99.086,-0.254 ; 98.578,75.722 99.086,77.246 ; 98.832,-0.254 99.34,-0.254 ; 98.832,77.246 99.34,77.246 ; 99.086,31.996 99.086,-0.254 ; 99.086,44.997 99.086,77.246 ; 99.594,1.27 99.086,-0.254 ; 99.594,75.722 99.086,77.246
  text "77.5 (mm)" at 100,32.25 h1.52 r90
  text "92.5 (mm)" at 39.75,-7 h1.52
3D Model:
  circle w0.254: c79.5,24.5 r10.253